# Altium PCB PZT_board.PcbDoc
Units mm, origin at the board's own origin, x right, y up, seen from the top; angles counter-clockwise.
Board outline 35 x 35 mm, 2 copper layers (Top Layer, Bottom Layer); 6 components, 3 nets, 44 pads, 4 vias.
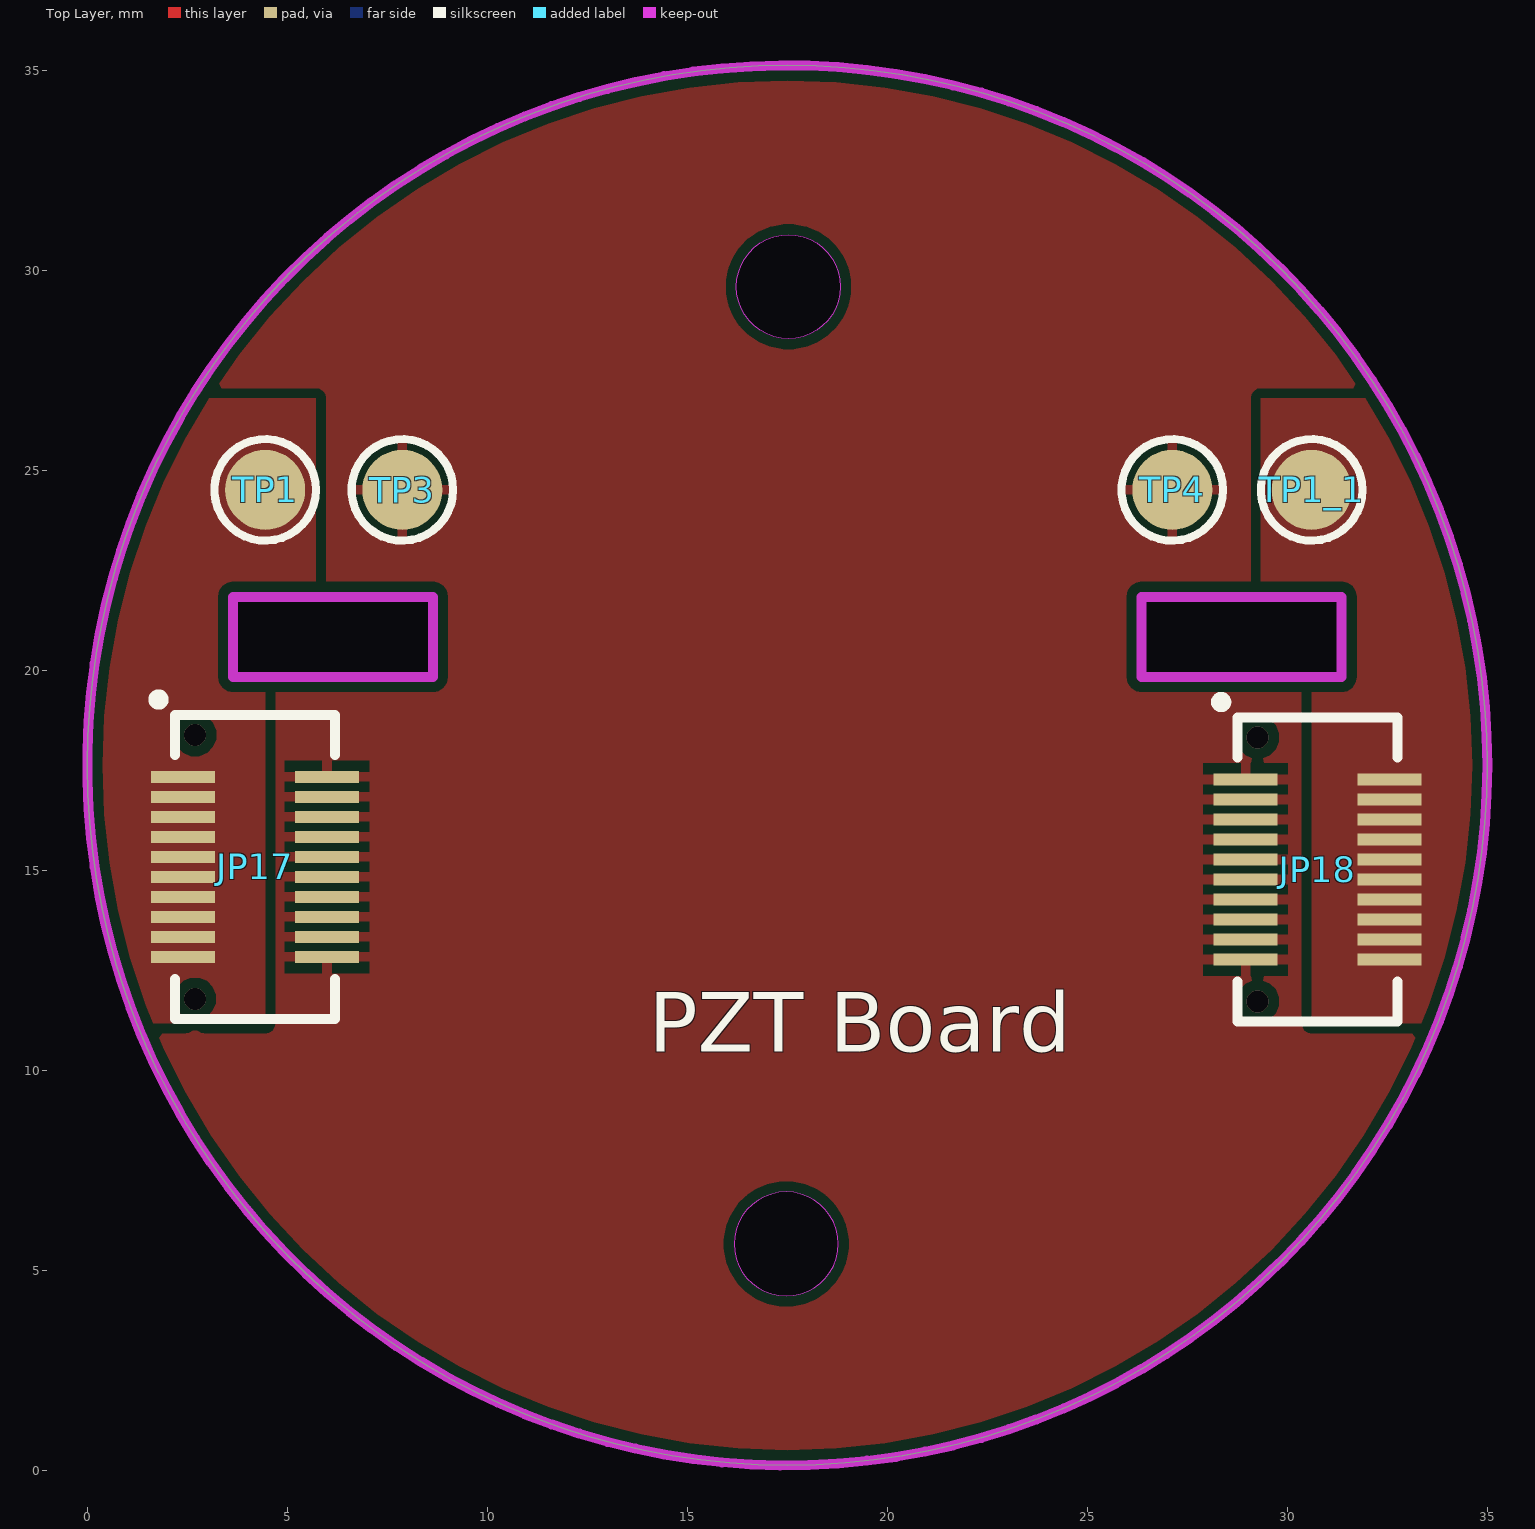
[diagram p0: Top Layer view]
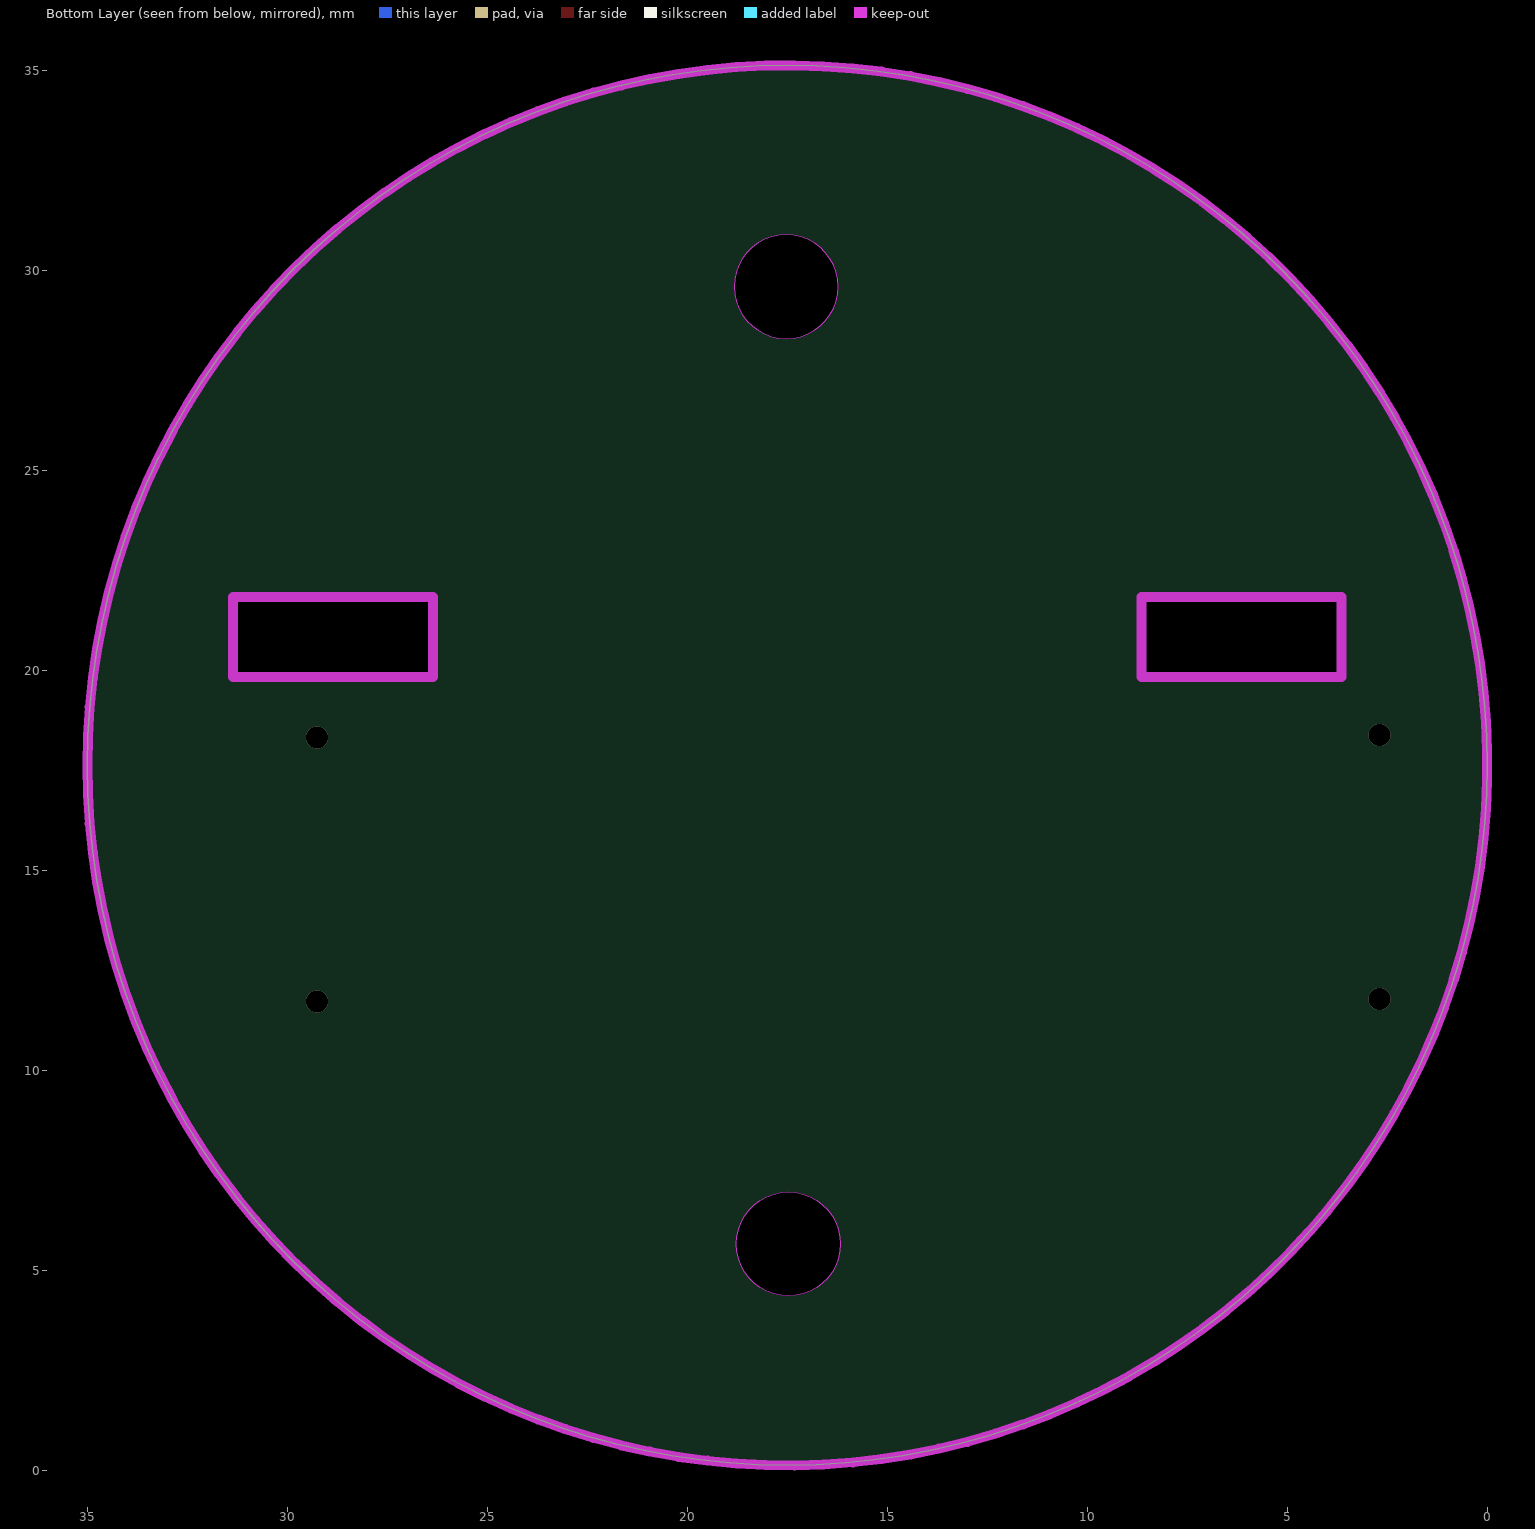
[diagram p1: Bottom Layer view, seen from below]

## Layer stack, top to bottom
Top Solder: solder mask 0.0102, Solder Resist, Dk 3.5
Top Layer: signal copper 0.0356
Dielectric 1: dielectric 0.32, FR-4, Dk 4.8
Bottom Layer: signal copper 0.0356
Bottom Solder: solder mask 0.0102, Solder Resist, Dk 3.5

## Board outline
-0.002,17.625 ccw(c17.498,17.625) 17.498,0.125 ccw(c17.498,17.625) 34.998,17.625 ccw(c17.498,17.625) 17.498,35.125 ccw(c17.498,17.625)
cut-out: 16.17,5.659 ccw(c17.47,5.659) 17.47,4.359 ccw(c17.47,5.659) 18.77,5.659 ccw(c17.47,5.659) 17.47,6.959 ccw(c17.47,5.659)
cut-out: 17.526,28.291 cw(c17.526,29.591) 16.226,29.591 cw(c17.526,29.591) 17.526,30.891 cw(c17.526,29.591) 18.826,29.591 cw(c17.526,29.591)
cut-out: 26.356,19.836 31.356,19.836 31.356,21.836 26.356,21.836
cut-out: 3.64,19.836 8.64,19.836 8.64,21.836 3.64,21.836

## Design rules (kind name [scope] priority, off if disabled: settings)
Clearance [All] p1: gap=0.254 ignorepadtopadclearanceinfootprint=FALSE except(0: Arc-Hole Track-Hole SMDPad-Hole THPad-Hole Via-Hole Fill-Hole Poly-Hole Region-Hole Text-Hole)
PolygonConnect [All] p1: connectstyle=Relief reliefconductorwidth=0.254 reliefentries=4 polygonreliefangle="90 Angle" airgapwidth=0.254
RoutingVias [All] p1: holewidth=0.711 width=1.27 viastyle="Through Hole" minholewidth=0.711 minwidth=1.27 maxholewidth=0.711 maxwidth=1.27
SolderMaskExpansion [All] p1: expansion=0.102 istentingtop=FALSE
Width [All] p1: maxlimit=0.254 minlimit=0.254 preferedwidth=0.254
30 further rules are at their usual default settings.

## Components (designator, comment, footprint, x,y, rotation, side; value= is the part's Value field where it differs from the comment)
JP17 "Header 10*2" BTB-0.5MM-SMD-M_2*10PIN 4.191,15.085 r0 top
JP18 "Header 10*2" BTB-0.5MM-SMD-M_2*10PIN 30.756,15.022 r0 top
TP1 "TEST" "TEST 2.0" 4.445,24.511 r0 top
TP1_1 "TEST" "TEST 2.0" 30.607,24.511 r180 top (schematic designator TP1)
TP3 "TEST" "TEST 2.0" 7.874,24.511 r0 top
TP4 "TEST" "TEST 2.0" 27.122,24.511 r0 top

## Footprints (in the part's own frame and the unit in brackets; to place one, negate y for a bottom-side part, rotate by r counter-clockwise, add the part's x,y. Pads: shape width x height; smd on the part's side, far side on the other; paste and mask are expansions set on the pad)
BTB-0.5MM-SMD-M_2*10PIN [mm] "0.5单槽板对板公座，H3.0-5.0，20PIN"
  rect 1.6x0.3 smd: 1(-1.8,2.25) 2(1.8,2.25) 3(-1.8,1.75) 4(1.8,1.75) 5(-1.8,1.25) 6(1.8,1.25) 7(-1.8,0.75) 8(1.8,0.75) 9(-1.8,0.25) 10(1.8,0.25) 11(-1.8,-0.25) 12(1.8,-0.25) 13(-1.8,-0.75) 14(1.8,-0.75) 15(-1.8,-1.25) 16(1.8,-1.25) 17(-1.8,-1.75) 18(1.8,-1.75) 19(-1.8,-2.25) 20(1.8,-2.25)
  silkscreen extent -2.54,-3.8 2,4.31, body extent -2.3,-3.55 2.3,3.55, height 2.7
"TEST 2.0" [mm] "测试点2.0mm"
  round 2 smd paste-2: 1(0,0)
  silkscreen extent -1.27,-1.27 1.27,1.27

## Part data
JP17 JP18: "BTB Connector"
TP1 TP1_1 TP3 TP4: "测试点", BOM名称=测试点, 学习资源=https://shop463601444.taobao.com, 版权归属="封装库来自淘宝 ID：黄晶宝石"

## Via types
v1: diameter 0.55, hole 0.55, Top Layer to Bottom Layer, 4 vias

## Nets (pads, with @x,y where several pads share a name; then routed paths per layer and width w, separated by ;. In a path a pad name is that pad's centre, name@x,y a point inside that pad or via, vN(x,y) a via of type N, cw(c..) or ccw(c..) an arc to the next point about the centre after c; other vN are vias at no path point)
AGND: JP17.2 JP17.4 JP17.6 JP17.8 JP17.10 JP17.12 JP17.14 JP17.16 JP17.18 JP17.20 JP18.1 JP18.3 JP18.5 JP18.7 JP18.9 JP18.11 JP18.13 JP18.15 JP18.17 JP18.19 TP3.1 TP4.1
PZT_OUT_A: JP17.1 JP17.3 JP17.5 JP17.7 JP17.9 JP17.11 JP17.13 JP17.15 JP17.17 JP17.19 TP1.1
PZT_OUT_B: JP18.2 JP18.4 JP18.6 JP18.8 JP18.10 JP18.12 JP18.14 JP18.16 JP18.18 JP18.20 TP1_1.1
copper on no net:
  other v1: 29.256,11.722 2.691,11.785 29.256,18.322 2.691,18.385

## Polygon pours and split planes (outlines as drawn)
AGND on Top Layer "AGND_L01_P003" (solid, remove dead copper, pour order 3): -0.002,17.625 ccw(c17.498,17.625) 17.498,0.125 ccw(c17.498,17.625) 34.998,17.625 ccw(c17.498,17.625) 17.498,35.125 ccw(c17.498,17.625)
PZT_OUT_B on Top Layer "PZT_OUT_B_L01_P001" (solid, remove dead copper, pour order 1): 32.512,26.797 29.337,26.797 29.337,19.812 30.607,19.812 30.607,11.176 34.29,11.176 36.83,13.716 36.703,13.843 36.703,24.892
PZT_OUT_A on Top Layer "PZT_OUT_A_L01_P000" (solid, remove dead copper, pour order 0): 2.54,26.797 5.715,26.797 5.715,19.812 4.445,19.812 4.445,11.176 0.762,11.176 -1.778,13.716 -1.651,13.843 -1.651,24.892

## Keep-outs
Keep-Out Layer:
  circle w0.25: c17.498,17.625 r17.5
  lines w0.25: 3.64,19.836 8.64,19.836 8.64,21.836 3.64,21.836 3.64,19.836 ; 26.356,19.836 26.356,21.836 31.356,21.836 31.356,19.836 26.356,19.836

## Silkscreen, mask and mechanical layers (free items; w line width, h text height)
Top Overlay:
  text "PZT Board" at 14.038,9.981 h2.54
Top Solder:
  circle w0.127: c17.47,5.659 r2.25
  region: 15.276,29.591 ccw(c17.526,29.591) 17.526,27.341 ccw(c17.526,29.591) 19.776,29.591 ccw(c17.526,29.591) 17.526,31.841 ccw(c17.526,29.591)
  region: 15.22,5.659 ccw(c17.47,5.659) 17.47,3.409 ccw(c17.47,5.659) 19.72,5.659 ccw(c17.47,5.659) 17.47,7.909 ccw(c17.47,5.659)
Mechanical 1:
  circle w0.25: c17.47,5.659 r1.3
  circle w0.25: c17.526,29.591 r1.3
  circle w0.25: c17.498,17.625 r17.5
  lines w0.25: 3.64,19.836 3.64,21.836 8.64,21.836 8.64,19.836 3.64,19.836 ; 26.356,19.836 31.356,19.836 31.356,21.836 26.356,21.836 26.356,19.836
Mechanical 2:
  circle w0.127: c12.192,27.432 r3
  lines w0.127: 3.683,6.86 3.683,22.86